# Altium PCB PCB1.PcbDoc (part 2 of 2)
Units mm, origin at the board's own origin, x right, y up, seen from the top; angles counter-clockwise.
Board outline 65.4 x 65.4 mm, 4 copper layers (Top Layer, Internal Plane 1, Signal Layer 1, Bottom Layer), stack 0.778 mm thick; 79 components, 51 nets, 285 pads, 952 vias.
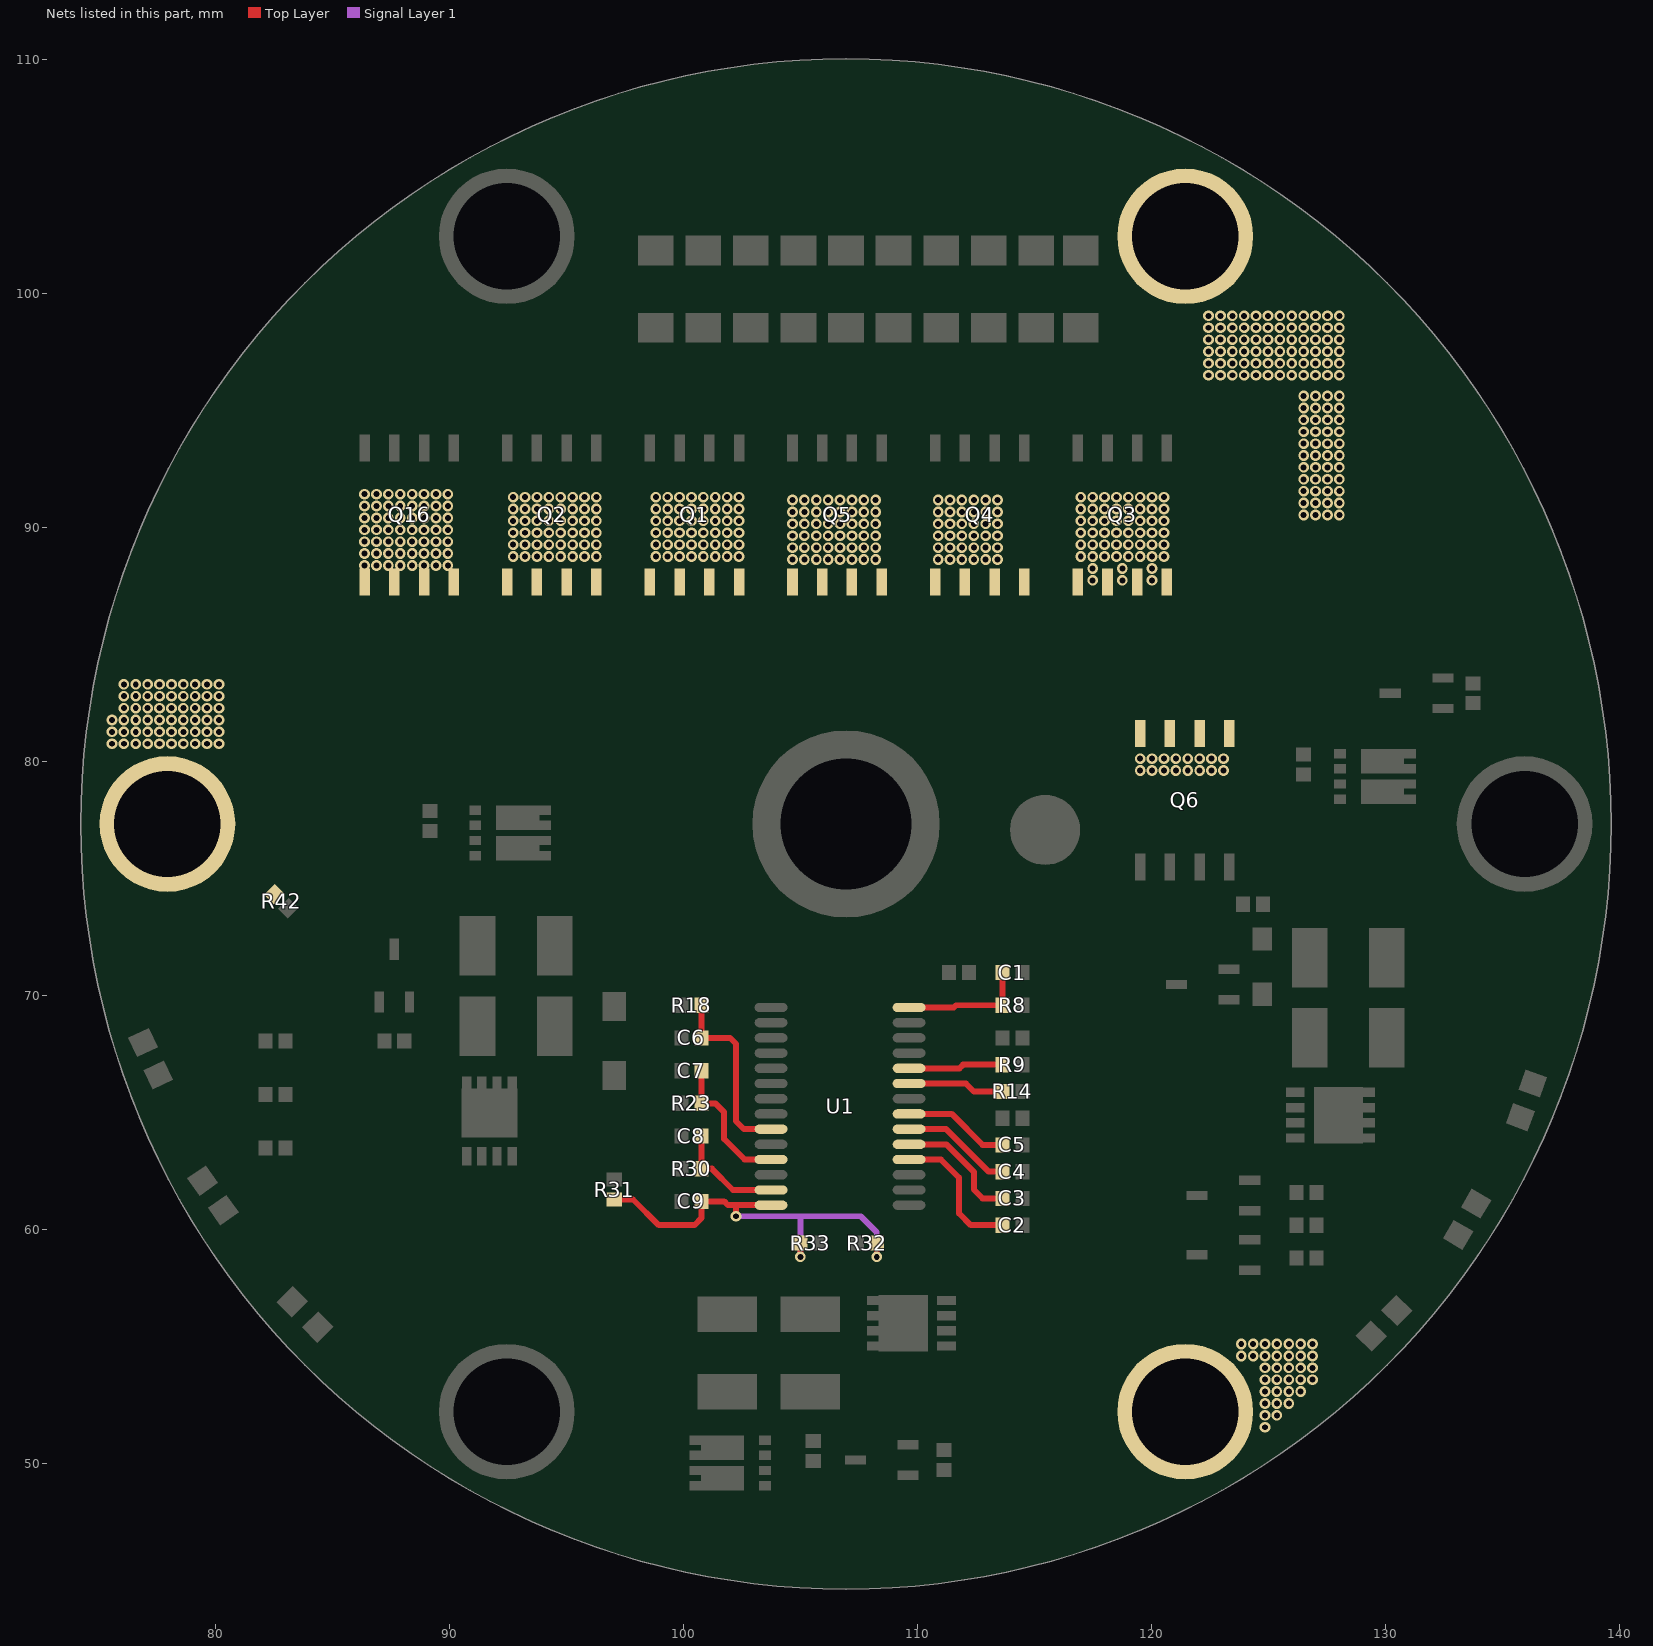
[diagram p4: the nets of this part, all layers, seen from the top]

## Via types
v1: diameter 0.457, hole 0.254, Top Layer to Bottom Layer, tented both sides, 952 vias

## Nets (pads, with @x,y where several pads share a name; then routed paths per layer and width w, separated by ;. In a path a pad name is that pad's centre, name@x,y a point inside that pad or via, vN(x,y) a via of type N, cw(c..) or ccw(c..) an arc to the next point about the centre after c; other vN are vias at no path point) (continued)
P-: pad.0@77.934,77.343 pad.0@121.434,52.228 pad.0@121.434,102.458 Q1.5 Q1.6 Q1.7 Q1.8 Q2.5 Q2.6 Q2.7 Q2.8 Q3.5 Q3.6 Q3.7 Q3.8 Q4.5 Q4.6 Q4.7 Q4.8 Q5.5 Q5.6 Q5.7 Q5.8 Q6.5 Q6.6 Q6.7 Q6.8 Q16.5 Q16.6 Q16.7 Q16.8 R42.2
  other v1: 124.841,51.562 124.841,52.07 125.349,52.07 124.841,52.578 125.349,52.578 125.857,52.578 124.841,53.086 125.349,53.086 125.857,53.086 126.365,53.086 124.841,53.594 125.349,53.594 125.857,53.594 126.365,53.594 126.873,53.594 124.841,54.102 125.349,54.102 125.857,54.102 126.365,54.102 126.873,54.102 123.825,54.61 124.333,54.61 124.841,54.61 125.349,54.61 125.857,54.61 126.365,54.61 126.873,54.61 123.825,55.118 124.333,55.118 124.841,55.118 125.349,55.118 125.857,55.118 126.365,55.118 126.873,55.118 119.507,79.629 120.015,79.629 120.523,79.629 121.031,79.629 121.539,79.629 122.047,79.629 122.555,79.629 123.063,79.629 119.507,80.137 120.015,80.137 120.523,80.137 121.031,80.137 121.539,80.137 122.047,80.137 122.555,80.137 123.063,80.137 75.565,80.772 76.073,80.772 76.581,80.772 77.089,80.772 77.597,80.772 78.105,80.772 78.613,80.772 79.121,80.772 79.629,80.772 80.137,80.772 75.565,81.28 76.073,81.28 76.581,81.28 77.089,81.28 77.597,81.28 78.105,81.28 78.613,81.28 79.121,81.28 79.629,81.28 80.137,81.28 75.565,81.788 76.073,81.788 76.581,81.788 77.089,81.788 77.597,81.788 78.105,81.788 78.613,81.788 79.121,81.788 79.629,81.788 80.137,81.788 76.073,82.296 76.581,82.296 77.089,82.296 77.597,82.296 78.105,82.296 78.613,82.296 79.121,82.296 79.629,82.296 80.137,82.296 76.073,82.804 76.581,82.804 77.089,82.804 77.597,82.804 78.105,82.804 78.613,82.804 79.121,82.804 79.629,82.804 80.137,82.804 76.073,83.312 76.581,83.312 77.089,83.312 77.597,83.312 78.105,83.312 78.613,83.312 79.121,83.312 79.629,83.312 80.137,83.312 117.475,87.757 118.745,87.757 120.015,87.757 117.475,88.265 118.745,88.265 120.015,88.265 86.36,88.392 86.868,88.392 87.376,88.392 87.884,88.392 88.392,88.392 88.9,88.392 89.408,88.392 89.916,88.392 104.648,88.646 105.156,88.646 105.664,88.646 106.172,88.646 106.68,88.646 107.188,88.646 107.696,88.646 108.204,88.646 110.871,88.646 111.379,88.646 111.887,88.646 112.395,88.646 112.903,88.646 113.411,88.646 92.71,88.773 93.218,88.773 93.726,88.773 94.234,88.773 94.742,88.773 95.25,88.773 95.758,88.773 96.266,88.773 98.806,88.773 99.314,88.773 99.822,88.773 100.33,88.773 100.838,88.773 101.346,88.773 101.854,88.773 102.362,88.773 116.967,88.773 117.475,88.773 117.983,88.773 118.491,88.773 118.999,88.773 119.507,88.773 120.015,88.773 120.523,88.773 86.36,88.9 86.868,88.9 87.376,88.9 87.884,88.9 88.392,88.9 88.9,88.9 89.408,88.9 89.916,88.9 104.648,89.154 105.156,89.154 105.664,89.154 106.172,89.154 106.68,89.154 107.188,89.154 107.696,89.154 108.204,89.154 110.871,89.154 111.379,89.154 111.887,89.154 112.395,89.154 112.903,89.154 113.411,89.154 92.71,89.281 93.218,89.281 93.726,89.281 94.234,89.281 94.742,89.281 95.25,89.281 95.758,89.281 96.266,89.281 98.806,89.281 99.314,89.281 99.822,89.281 100.33,89.281 100.838,89.281 101.346,89.281 101.854,89.281 102.362,89.281 116.967,89.281 117.475,89.281 117.983,89.281 118.491,89.281 118.999,89.281 119.507,89.281 120.015,89.281 120.523,89.281 86.36,89.408 86.868,89.408 87.376,89.408 87.884,89.408 88.392,89.408 88.9,89.408 89.408,89.408 89.916,89.408 104.648,89.662 105.156,89.662 105.664,89.662 106.172,89.662 106.68,89.662 107.188,89.662 107.696,89.662 108.204,89.662 110.871,89.662 111.379,89.662 111.887,89.662 112.395,89.662 112.903,89.662 113.411,89.662 92.71,89.789 93.218,89.789 93.726,89.789 94.234,89.789 94.742,89.789 95.25,89.789 95.758,89.789 96.266,89.789 98.806,89.789 99.314,89.789 99.822,89.789 100.33,89.789 100.838,89.789 101.346,89.789 101.854,89.789 102.362,89.789 116.967,89.789 117.475,89.789 117.983,89.789 118.491,89.789 118.999,89.789 119.507,89.789 120.015,89.789 120.523,89.789 86.36,89.916 86.868,89.916 87.376,89.916 87.884,89.916 88.392,89.916 88.9,89.916 89.408,89.916 89.916,89.916 104.648,90.17 105.156,90.17 105.664,90.17 106.172,90.17 106.68,90.17 107.188,90.17 107.696,90.17 108.204,90.17 110.871,90.17 111.379,90.17 111.887,90.17 112.395,90.17 112.903,90.17 113.411,90.17 92.71,90.297 93.218,90.297 93.726,90.297 94.234,90.297 94.742,90.297 95.25,90.297 95.758,90.297 96.266,90.297 98.806,90.297 99.314,90.297 99.822,90.297 100.33,90.297 100.838,90.297 101.346,90.297 101.854,90.297 102.362,90.297 116.967,90.297 117.475,90.297 117.983,90.297 118.491,90.297 118.999,90.297 119.507,90.297 120.015,90.297 120.523,90.297 86.36,90.424 86.868,90.424 87.376,90.424 87.884,90.424 88.392,90.424 88.9,90.424 89.408,90.424 89.916,90.424 126.492,90.551 127,90.551 127.508,90.551 128.016,90.551 104.648,90.678 105.156,90.678 105.664,90.678 106.172,90.678 106.68,90.678 107.188,90.678 107.696,90.678 108.204,90.678 110.871,90.678 111.379,90.678 111.887,90.678 112.395,90.678 112.903,90.678 113.411,90.678 92.71,90.805 93.218,90.805 93.726,90.805 94.234,90.805 94.742,90.805 95.25,90.805 95.758,90.805 96.266,90.805 98.806,90.805 99.314,90.805 99.822,90.805 100.33,90.805 100.838,90.805 101.346,90.805 101.854,90.805 102.362,90.805 116.967,90.805 117.475,90.805 117.983,90.805 118.491,90.805 118.999,90.805 119.507,90.805 120.015,90.805 120.523,90.805 86.36,90.932 86.868,90.932 87.376,90.932 87.884,90.932 88.392,90.932 88.9,90.932 89.408,90.932 89.916,90.932 126.492,91.059 127,91.059 127.508,91.059 128.016,91.059 104.648,91.186 105.156,91.186 105.664,91.186 106.172,91.186 106.68,91.186 107.188,91.186 107.696,91.186 108.204,91.186 110.871,91.186 111.379,91.186 111.887,91.186 112.395,91.186 112.903,91.186 113.411,91.186 92.71,91.313 93.218,91.313 93.726,91.313 94.234,91.313 94.742,91.313 95.25,91.313 95.758,91.313 96.266,91.313 98.806,91.313 99.314,91.313 99.822,91.313 100.33,91.313 100.838,91.313 101.346,91.313 101.854,91.313 102.362,91.313 116.967,91.313 117.475,91.313 117.983,91.313 118.491,91.313 118.999,91.313 119.507,91.313 120.015,91.313 120.523,91.313 86.36,91.44 86.868,91.44 87.376,91.44 87.884,91.44 88.392,91.44 88.9,91.44 89.408,91.44 89.916,91.44 126.492,91.567 127,91.567 127.508,91.567 128.016,91.567 126.492,92.075 127,92.075 127.508,92.075 128.016,92.075 126.492,92.583 127,92.583 127.508,92.583 128.016,92.583 126.492,93.091 127,93.091 127.508,93.091 128.016,93.091 126.492,93.599 127,93.599 127.508,93.599 128.016,93.599 126.492,94.107 127,94.107 127.508,94.107 128.016,94.107 126.492,94.615 127,94.615 127.508,94.615 128.016,94.615 126.492,95.123 127,95.123 127.508,95.123 128.016,95.123 126.492,95.631 127,95.631 127.508,95.631 128.016,95.631 122.428,96.52 122.936,96.52 123.444,96.52 123.952,96.52 124.46,96.52 124.968,96.52 125.476,96.52 125.984,96.52 126.492,96.52 127,96.52 127.508,96.52 128.016,96.52 122.428,97.028 122.936,97.028 123.444,97.028 123.952,97.028 124.46,97.028 124.968,97.028 125.476,97.028 125.984,97.028 126.492,97.028 127,97.028 127.508,97.028 128.016,97.028 122.428,97.536 122.936,97.536 123.444,97.536 123.952,97.536 124.46,97.536 124.968,97.536 125.476,97.536 125.984,97.536 126.492,97.536 127,97.536 127.508,97.536 128.016,97.536 122.428,98.044 122.936,98.044 123.444,98.044 123.952,98.044 124.46,98.044 124.968,98.044 125.476,98.044 125.984,98.044 126.492,98.044 127,98.044 127.508,98.044 128.016,98.044 122.428,98.552 122.936,98.552 123.444,98.552 123.952,98.552 124.46,98.552 124.968,98.552 125.476,98.552 125.984,98.552 126.492,98.552 127,98.552 127.508,98.552 128.016,98.552 122.428,99.06 122.936,99.06 123.444,99.06 123.952,99.06 124.46,99.06 124.968,99.06 125.476,99.06 125.984,99.06 126.492,99.06 127,99.06 127.508,99.06 128.016,99.06
TOC1: C4.1 U1.6 | length 4.7
  Top Layer w0.254: U1.6@109.63,64.303 111.211,64.303 113.03,62.484 C4.1@113.621,62.484
TOC2: C5.1 U1.7 | length 4.5
  Top Layer w0.254: U1.7@109.63,64.953 111.45,64.953 112.776,63.627 C5.1@113.621,63.627
TOV: C2.1 U1.4 | length 6
  Top Layer w0.254: U1.4@109.63,63.003 110.987,63.003 111.76,62.23 111.76,60.706 112.268,60.198 C2.1@113.621,60.198
TOVD: C3.1 U1.5 | length 5.4
  Top Layer w0.254: U1.5@109.63,63.653 111.222,63.653 112.395,62.48 112.395,61.722 112.776,61.341 C3.1@113.621,61.341
TRH: R14.1 U1.9 | length 4.1
  Top Layer w0.254: U1.9@109.63,66.253 112.055,66.253 112.395,65.913 R14.1@113.621,65.913
V+: C9.2 R31.1 R32.2 R33.2 U1.28 | length 18.8
  Top Layer w0.254: R31.1@97.028,61.297 97.834,61.297 98.933,60.198 100.457,60.198 100.755,60.496 C9.2@100.755,61.214 101.727,61.214 101.888,61.053 102.235,61.053 ; v1(102.235,60.579) 102.235,61.053 ; U1.28@103.73,61.053 102.235,61.053 ; v1(104.985,58.845) R33.2@104.985,59.436 ; v1(108.248,58.845) R32.2@108.248,59.436
  Signal Layer 1 w0.254: v1(102.235,60.579) 104.902,60.579 ; v1(104.985,58.845) 104.985,60.496 104.902,60.579 ; v1(108.248,58.845) 108.248,59.9 107.569,60.579 104.902,60.579
VC1: C6.2 R18.1 U1.23 | length 7.9
  Top Layer w0.254: R18.1@100.755,69.596 C6.2@100.755,68.199 101.981,68.199 102.235,67.945 102.235,64.643 102.575,64.303 U1.23@103.73,64.303
VC2: C7.2 R23.1 U1.25 | length 6
  Top Layer w0.254: C7.2@100.755,66.802 R23.1@100.755,65.405 101.346,65.405 101.727,65.024 101.727,63.881 102.605,63.003 U1.25@103.73,63.003
VC3: C8.2 R30.1 U1.27 | length 4.7
  Top Layer w0.254: C8.2@100.755,64.008 R30.1@100.755,62.611 101.2,62.611 102.108,61.703 U1.27@103.73,61.703
VIN: C1.1 R8.1 U1.14 | length 5.4
  Top Layer w0.254: U1.14@109.63,69.503 111.54,69.503 111.633,69.596 R8.1@113.621,69.596 C1.1@113.621,70.993
VM: R9.1 U1.10 | length 4.1
  Top Layer w0.254: U1.10@109.63,66.903 111.786,66.903 111.939,67.056 R9.1@113.621,67.056
pads on no net: U1.1 U1.13 U1.15 U1.18 U1.20

## Polygon pours and split planes (outlines as drawn)
BAT- on Top Layer "Component Side-No Net 1" (solid, remove dead copper, pour order 86): 76.454,88.392 75.438,89.408 75.438,109.093 83.566,109.093 89.281,114.808 89.408,114.681 116.332,114.681 116.332,109.093 120.777,104.648 119.507,103.378 119.507,90.297
ISEN_N on Top Layer "Component Side-No Net 1" (solid, remove dead copper, pour order 82): 92.983,92.583 86.106,92.583 86.106,97.663 86.487,98.044 86.741,98.298 93.091,98.298
P- on Top Layer "Component Side-No Net 1" (solid, remove dead copper, pour order 80): 119.507,55.753 119.634,55.88 127.127,55.88 127.127,47.879 127,47.752 124.714,45.466 117.856,45.466 117.856,53.975 118.618,54.737
7V4 on Top Layer "Component Side-No Net 1" (solid, remove dead copper, pour order 79): 90.17,63.627 92.329,63.627 92.329,60.198 92.583,59.944 92.71,59.817 94.615,59.817 99.06,59.817 99.695,59.182 99.822,59.055 99.822,53.467 97.409,53.467 96.52,54.356 95.123,55.753 90.043,55.753 90.043,63.5 90.17,63.627
CELL3 on Top Layer "Component Side-No Net 1" (solid, remove dead copper, pour order 78): 90.297,67.056 92.202,67.056 92.964,67.818 92.964,73.533 93.218,73.787 94.234,73.787 94.361,73.787 94.742,74.168 94.742,77.47 92.277,77.47 91.896,77.089 91.659,76.852 91.659,76.399 90.796,76.399 90.201,75.804
12VBAL on Top Layer "Component Side-No Net 1" (solid, remove dead copper, pour order 77): 90.043,63.881 94.488,63.881 95.504,64.897 95.885,65.278 95.885,68.961 95.885,73.533 95.631,73.787 93.218,73.787 93.091,73.66 92.964,73.533 92.964,71.247 92.964,67.818 92.456,67.31 92.202,67.056 90.678,67.056 90.297,67.056 90.043,66.802
12V on Top Layer "Component Side-No Net 1" (solid, remove dead copper, pour order 76): 91.821,77.089 96.774,77.089 98.552,77.089 101.473,74.168 102.87,72.771 107.569,72.771 111.125,72.771 112.268,73.914 112.395,74.041 113.157,74.041 113.157,83.058 112.776,83.439 91.821,83.439
NetQ13_1 on Top Layer "Component Side-No Net 1" (solid, remove dead copper, pour order 75): 88.265,78.613 91.313,78.613 91.44,78.486 91.694,78.232 91.694,76.708 91.694,76.327 91.567,76.2 91.059,75.692 90.551,75.692 88.265,75.692
3V7 on Top Layer "Component Side-No Net 1" (solid, remove dead copper, pour order 72): 110.744,56.515 114.681,56.515 114.681,54.864 110.744,54.864
7V4BAL on Top Layer "Component Side-No Net 1" (solid, remove dead copper, pour order 71): 99.822,57.404 100.076,57.404 110.617,57.404 110.617,54.737 110.49,54.61 99.822,54.61
7V4 on Top Layer "Component Side-No Net 1" (solid, remove dead copper, pour order 69): 100.33,50.165 100.347,50.148 102.783,50.148 102.783,51.475 103.124,51.816 103.251,51.943 106.68,51.943 106.934,52.197 106.934,53.594 106.934,54.102 106.68,54.356 99.695,54.356 96.901,54.356 96.393,53.848 96.139,53.594 96.139,50.292 96.393,50.292 97.536,49.149
NetQ7_1 on Top Layer "Component Side-No Net 1" (solid, remove dead copper, pour order 68): 103.124,50.673 103.251,50.546 106.045,50.546 106.045,48.387 105.918,48.26 105.791,48.133 102.616,48.133 102.616,50.673
CELL2 on Top Layer "Component Side-No Net 1" (solid, remove dead copper, pour order 67): 99.822,49.911 102.616,49.911 102.616,44.196 92.202,44.196 91.694,44.704 88.519,44.704 88.519,52.832 88.519,54.102 88.519,55.118 89.154,55.753 93.345,55.753 95.123,55.753 96.012,54.864 96.52,54.356 96.52,51.689 96.52,51.562 97.79,50.292 98.171,49.911 99.568,49.911
BAT- on Top Layer "Component Side-No Net 1" (solid, remove dead copper, pour order 66): 126.619,64.389 123.19,64.389 123.19,66.167 126.619,66.167
3V7BAL on Top Layer "Component Side-No Net 1" (solid, remove dead copper, pour order 65): 125.73,73.025 128.651,73.025 129.032,72.644 129.921,71.755 129.921,66.802 129.921,64.008 129.54,63.627 129.413,63.5 126.873,63.5 126.746,63.5 126.746,66.167 125.73,66.167 125.603,66.294
3V7 on Top Layer "Component Side-No Net 1" (solid, remove dead copper, pour order 64): 128.905,79.248 128.905,67.056 129.159,66.802 130.81,66.802 131.445,66.802 132.588,67.945 133.096,68.453 133.096,75.057 133.096,79.629 128.905,79.629
CELL1 on Top Layer "Component Side-No Net 1" (solid, remove dead copper, pour order 63): 128.778,80.899 128.778,79.629 128.905,79.502 130.81,79.502 131.572,79.502 131.953,79.121 132.207,78.867 132.207,77.089 132.207,75.184 132.842,74.549 133.096,74.295 140.462,74.295 140.462,80.772 141.224,81.534 141.097,81.407 129.286,81.407
NetQ8_1 on Top Layer "Component Side-No Net 1" (solid, remove dead copper, pour order 62): 124.587,81.026 128.524,81.026 128.524,77.724 124.587,77.724
CHG- on Top Layer "Component Side-No Net 1" (solid, remove dead copper, pour order 61): 113.157,81.534 118.11,81.534 118.11,76.581 118.237,76.454 122.047,76.454 122.682,76.454 122.809,76.327 122.809,74.422 122.809,72.263 122.555,72.009 112.649,72.009 112.649,81.28 112.903,81.534
P- on Top Layer "Component Side-No Net 1" (solid, remove dead copper, pour order 60): 118.364,81.788 118.364,76.835 123.571,76.835 124.46,76.835 124.46,82.804 118.491,82.804 118.364,82.931
P- on Top Layer "Component Side-No Net 1" (solid, remove dead copper, pour order 50): 91.567,92.329 75.184,92.329 72.898,92.329 72.263,91.694 71.882,91.313 71.882,74.93 71.882,73.279 71.628,73.025 71.882,72.771 80.264,72.771 81.407,72.771 82.423,73.787 83.82,75.184 83.82,79.502 83.82,79.629 85.725,81.534 86.106,81.915 92.583,81.915 92.583,92.075 92.329,92.329
P- on Top Layer "Component Side-No Net 1" (solid, remove dead copper, pour order 49): 118.237,107.442 118.237,99.568 120.142,99.568 120.65,99.06 121.412,98.298 121.412,92.456 121.285,92.329 111.379,92.329 91.567,92.329 91.567,84.582 91.567,82.169 91.44,82.042 91.567,81.915 112.141,81.915 127.508,81.915 132.715,87.122 133.477,87.884 133.477,111.125 119.253,111.125 118.237,110.109
ISEN_N on Top Layer "Component Side-No Net 1" (solid, remove dead copper, pour order 48): 92.837,92.583 121.285,92.583 121.285,98.298 120.904,98.679 120.396,99.187 116.459,99.187 97.663,99.187 96.774,98.298 92.837,98.298
BAT- on Top Layer "Component Side-No Net 1" (solid, remove dead copper, pour order 47): 89.535,104.902 89.535,100.457 89.535,100.33 90.424,99.441 93.853,99.441 96.52,99.441 97.536,100.457 97.663,100.584 101.092,100.584 117.856,100.584 118.11,100.838 118.237,100.965 118.237,107.569 118.237,110.871 118.11,110.998 117.729,111.379 89.535,111.379
BAT- on Top Layer "Component Side-No Net 1" (solid, remove dead copper, pour order 70): 71.628,41.402 72.009,41.783 138.938,41.783 138.938,50.927 146.558,58.547 146.177,58.928 146.177,112.141 79.502,112.141 66.548,125.095
BAT- on Bottom Layer "Component Side-No Net 1" (solid, remove dead copper, pour order 87): 66.929,111.76 136.906,111.76 138.557,110.109 146.685,101.981 146.685,46.99 146.685,38.989 138.43,30.734 134.493,34.671 64.897,34.671
P- on Bottom Layer "Component Side-No Net 1" (solid, remove dead copper, pour order 85): 84.201,77.724 84.201,78.486 87.63,81.915 118.237,81.915 118.491,81.915 118.872,81.534 118.872,78.994 119.253,78.613 123.063,78.613 123.444,78.994 124.206,79.756 124.206,81.915 124.206,82.042 127.762,85.598 129.921,87.757 129.921,97.282 129.921,97.663 130.302,98.044 133.858,98.044 133.858,105.41 134.493,106.045 129.921,110.617 128.778,110.617 90.551,110.617 90.043,110.109 90.297,109.855 90.297,96.012 90.297,93.472 89.154,92.329 89.027,92.456 83.947,92.456 77.343,92.456 76.962,92.075
ISEN_N on Bottom Layer "Component Side-No Net 1" (solid, remove dead copper, pour order 84): 92.837,92.785 87.936,92.785 87.884,92.837 87.884,97.282 87.884,98.425 88.519,99.06 88.646,99.187 88.773,99.187 93.726,99.187 93.599,99.06 93.599,92.71
P- on Bottom Layer "Component Side-No Net 1" (solid, remove dead copper, pour order 56): 81.661,75.184 84.201,77.724 84.201,83.947 84.201,84.328 85.471,85.598 89.154,85.598 127.762,85.598 129.286,87.122 129.794,87.63 129.794,103.759 124.333,103.759 119.253,108.839 117.729,107.315 117.729,92.71 117.729,91.313 115.951,89.535 115.316,90.17 78.613,90.17 78.613,76.327 77.343,75.057
P- on Bottom Layer "Component Side-No Net 1" (solid, remove dead copper, pour order 74): 114.3,45.466 114.3,50.8 114.173,50.927 119.38,56.134 130.564,56.134 131.243,55.455 131.318,55.38 131.318,46.355
3V7 on Bottom Layer "Component Side-No Net 1" (solid, remove dead copper, pour order 73): 132.588,72.517 132.588,61.595 130.048,59.055 128.143,57.15 124.079,57.15 118.237,57.15 116.459,55.372 116.078,54.991 112.649,54.991 111.76,54.991 111.506,55.245 111.506,56.388 111.506,56.642 111.633,56.769 111.76,56.896 112.268,56.896 114.808,56.896 115.697,57.785 117.729,59.817 120.015,59.817 126.746,59.817 128.905,61.976 130.556,63.627 130.556,72.39 130.81,72.644 132.461,72.644
ISEN_N on Bottom Layer "Component Side-No Net 1" (solid, remove dead copper, pour order 58): 92.837,92.329 92.837,99.568 93.218,99.949 94.615,101.346 118.872,101.346 118.872,92.583 118.745,92.456 117.856,91.567 115.062,91.567
P- on Bottom Layer "Component Side-No Net 1" (solid, remove dead copper, pour order 55): 73.406,74.168 73.787,73.787 79.248,73.787 80.264,73.787 81.28,74.803 81.661,75.184 81.661,83.566 81.661,85.09 83.693,87.122 83.947,87.376 101.6,87.376 125.476,87.376 129.032,90.932 129.413,91.313 129.413,104.267 129.413,106.299 126.619,109.093 123.952,111.76 116.078,111.76 116.078,93.853 115.189,92.964 114.808,92.583 107.442,92.583 74.295,92.583 73.406,91.694
BAT- on Bottom Layer "Component Side-No Net 1" (solid, remove dead copper, pour order 51): 89.535,100.33 89.535,106.426 89.535,106.68 91.186,108.331 93.345,110.49 115.951,110.49 115.951,100.838 115.697,100.584 97.79,100.584 97.663,100.584 96.52,99.441 90.424,99.441
ISEN_N on Signal Layer 1 "Component Side-No Net 1" (solid, remove dead copper, pour order 92): 107.569,99.06 107.569,99.695 107.696,99.822 109.093,99.822 115.824,99.822 116.586,99.06 116.713,98.933 116.713,97.663 116.713,95.631 117.094,95.25 117.221,95.123 117.221,94.742 116.84,94.361 116.713,94.234 115.062,94.234 107.188,94.234
BAT- on Signal Layer 1 "Component Side-No Net 1" (solid, remove dead copper, pour order 91): 75.819,40.64 79.121,43.942 137.668,43.942 137.668,106.934 142.621,111.887 139.7,114.808 74.168,114.808 72.771,114.808 72.517,114.554
3V7 on Signal Layer 1 "Component Side-No Net 1" (solid, remove dead copper, pour order 90): 130.429,73.279 132.588,73.279 132.969,72.898 132.715,72.644 132.715,67.564 130.556,67.564 130.429,67.691
BAT- on Signal Layer 1 "Component Side-No Net 1" (solid, remove dead copper, pour order 89): 122.301,66.802 122.428,66.675 126.746,66.675 126.746,64.516 126.365,64.135 122.047,64.135
P- on Signal Layer 1 "Component Side-No Net 1" (solid, remove dead copper, pour order 88): 116.332,45.72 116.332,64.516 120.65,68.834 125.095,73.279 125.095,88.646 125.603,102.108 127,103.505 127.381,103.124 139.954,103.124 139.954,43.18 140.843,42.291
ISEN_N on Signal Layer 1 "Component Side-No Net 1" (solid, remove dead copper, pour order 83): 93.98,94.565 87.934,94.565 87.884,94.615 87.884,97.536 87.884,98.425 88.646,99.187 94.107,99.187 97.282,99.187 97.536,98.933 96.774,98.171 96.774,95.758
ISEN_N on Signal Layer 1 "Component Side-No Net 1" (solid, remove dead copper, pour order 81): 93.853,93.98 86.233,93.98 86.233,92.202 86.106,92.075 94.869,92.075 94.869,93.98 94.996,94.107
ISEN_N on Signal Layer 1 "Component Side-No Net 1" (solid, remove dead copper, pour order 59): 93.98,94.234 93.98,97.028 95.504,98.552 96.139,99.187 99.314,99.187 115.189,99.187 115.443,98.933 115.443,94.234
ISEN_N on Signal Layer 1 "Component Side-No Net 1" (solid, remove dead copper, pour order 57): 93.472,93.98 93.599,94.107 114.681,94.107 114.681,92.837 114.808,92.71 93.345,92.71
P- on Signal Layer 1 "Component Side-No Net 1" (solid, remove dead copper, pour order 54): 118.364,107.442 118.364,98.425 118.364,93.091 117.475,93.091 116.332,93.091 116.332,89.408 116.332,87.884 116.967,87.249 117.221,86.995 120.396,86.995 128.143,86.995 129.159,88.011 129.921,88.773 129.921,107.696 126.746,107.696 124.968,109.474
P- on Signal Layer 1 "Component Side-No Net 1" (solid, remove dead copper, pour order 53): 113.919,92.456 113.919,87.63 113.03,86.741 111.887,85.598 93.599,85.598 83.693,85.598 81.915,83.82 81.661,83.566 81.661,79.629 81.661,75.565 80.264,74.168 73.025,74.168 73.025,92.456
BAT- on Signal Layer 1 "Component Side-No Net 1" (solid, remove dead copper, pour order 52): 89.535,104.521 89.535,100.457 90.551,99.441 96.647,99.441 96.647,99.568 97.663,100.584 99.568,102.489 115.824,102.489 116.205,102.87 116.205,105.029 116.205,109.728 115.443,110.49 114.3,112.395 89.535,112.014
ISEN_N on Internal Plane 1 (split plane): 115.822,98.371 115.822,94.288 114.427,92.893 114.138,93.183 114.096,93.211 114.046,93.22 93.474,93.22 93.474,96.593 94.669,97.788 96.52,97.788 96.57,97.797 96.612,97.825 98.225,99.439 114.754,99.439
P- on Internal Plane 1 (split plane): 119.979,106.773 120.698,106.444 121.408,106.098 122.109,105.734 122.801,105.353 123.484,104.955 124.157,104.54 124.819,104.11 125.47,103.663 126.111,103.2 126.739,102.721 127.356,102.228 127.961,101.719 128.553,101.196 129.132,100.658 129.697,100.106 130.249,99.541 130.787,98.962 131.31,98.37 131.819,97.765 132.312,97.148 132.791,96.52 133.254,95.879 133.701,95.228 134.131,94.566 134.546,93.893 134.944,93.21 135.325,92.518 135.689,91.817 136.035,91.107 136.364,90.388 136.675,89.662 136.969,88.929 137.244,88.188 137.501,87.441 137.74,86.688 137.96,85.929 138.161,85.165 138.344,84.396 138.507,83.623 138.652,82.847 138.777,82.067 138.884,81.284 138.971,80.498 139.039,79.711 139.087,78.923 139.116,78.133 139.126,77.364 139.124,77.343 139.126,77.322 139.116,76.553 139.087,75.763 139.039,74.975 138.971,74.188 138.884,73.402 138.777,72.619 138.652,71.839 138.507,71.063 138.344,70.29 138.161,69.521 137.96,68.757 137.74,67.998 137.501,67.245 137.244,66.498 136.969,65.757 136.675,65.024 136.364,64.298 136.035,63.579 135.689,62.869 135.325,62.168 134.944,61.476 134.546,60.793 134.131,60.12 133.701,59.458 133.254,58.807 132.791,58.166 132.312,57.538 131.819,56.921 131.31,56.316 130.787,55.724 130.249,55.145 129.697,54.58 129.132,54.028 128.553,53.49 127.961,52.967 127.356,52.458 126.739,51.965 126.111,51.486 125.47,51.023 124.819,50.576 124.157,50.146 123.484,49.731 122.801,49.333 122.109,48.952 121.408,48.588 120.698,48.242 119.979,47.913 119.253,47.602 118.52,47.308 117.779,47.033 117.752,47.023 116.842,47.933 116.842,57.858 121.72,62.736 123.952,62.736 124.002,62.745 124.044,62.773 125.568,64.297 125.596,64.339 125.605,64.389 125.605,69.596 125.596,69.646 125.568,69.688 124.933,70.323 124.891,70.351 124.841,70.36 120.831,70.36 118.747,72.444 118.747,80.718 119.688,81.659 122.555,81.659 122.605,81.668 122.647,81.696 123.79,82.839 123.818,82.881 123.827,82.931 123.827,93.726 123.818,93.776 123.79,93.818 121.414,96.193 121.414,98.171 121.405,98.221 121.377,98.263 117.858,101.781 117.858,104.975 119.753,106.87
P- on Internal Plane 1 (split plane): 80.807,92.999 80.849,92.971 80.899,92.962 113.992,92.962 114.298,92.656 114.298,92.456 114.298,88.065 110.69,84.457 86.233,84.457 86.183,84.448 86.141,84.42 82.204,80.483 82.176,80.441 82.167,80.391 82.167,74.984 81.226,74.043 74.913,74.043 74.897,74.188 74.829,74.975 74.781,75.763 74.752,76.553 74.742,77.322 74.744,77.343 74.742,77.364 74.752,78.133 74.781,78.923 74.829,79.711 74.897,80.498 74.984,81.284 75.091,82.067 75.216,82.847 75.361,83.623 75.524,84.396 75.707,85.165 75.908,85.929 76.128,86.688 76.367,87.441 76.624,88.188 76.899,88.929 77.193,89.662 77.504,90.388 77.833,91.107 78.179,91.817 78.543,92.518 78.924,93.21 79.322,93.893 79.548,94.259
BAT- on Internal Plane 1 (split plane): 215 vertices, not listed, extent 74.942,45.151 125.347,109.535

## Keep-outs
Keep-Out Layer:
  circle w0.254: c106.934,77.343 r32.7

## Other copper
Internal Plane 1 (plane layer: these items are gaps in the copper):
  lines w0.254: 74.422,73.914 81.28,73.914 82.296,74.93 82.296,80.391 86.233,84.328 110.744,84.328 114.427,88.011 114.427,92.456 114.427,92.71 ; 79.375,94.615 80.899,93.091 114.046,93.091 114.427,92.71 ; 93.345,93.218 93.345,96.647 94.615,97.917 96.52,97.917 98.171,99.568 114.808,99.568 115.951,98.425 115.951,94.234 114.427,92.71 ; 117.983,46.609 116.713,47.879 116.713,57.912 121.666,62.865 123.952,62.865 125.476,64.389 125.476,69.596 124.841,70.231 120.777,70.231 118.618,72.39 118.618,80.772 119.634,81.788 122.555,81.788 123.698,82.931 123.698,93.726 121.285,96.139 121.285,98.171 117.729,101.727 117.729,105.029 120.142,107.442 120.142,107.696

## Silkscreen, mask and mechanical layers (free items; w line width, h text height)
Top Overlay:
  lines w0.254: 75.137,69.709 84.469,69.709 86.106,68.072 86.106,52.197 ; 127.889,52.959 127.889,61.214 130.429,63.754 130.429,65.786 132.334,67.691 137.668,67.691
  lines w1.5: 106.807,84.582 106.807,83.439 107.569,82.677 109.728,82.677 111.887,80.518 111.887,77.978 112.903,76.962
  text "P-" at 124.714,101.346 h2.5
  text "B-" at 86.995,100.711 h2.5
  text "V1.1" at 129.794,88.9 h2.5 r90
  text "Reverse" at 81.915,86.995 h2.5 r90
  text "Protected" at 84.328,86.995 h2.5 r90
  text "2025/03/08" at 132.334,85.344 h2.5 r90
  text "CELL1" at 137.541,80.518 h2.5 r90
  text "3S_LiBatt-Protector" at 80.645,80.391 h2.5
  text "CHG-" at 113.411,79.121 h2
  text "B+" at 102.362,76.962 h2.5 r90
  text "P-" at 81.28,76.454 h2.5
  text "RUVP" at 84.328,73.533 h2
  text "电池" at 133.096,71.501 h3
  text "均衡指示" at 75.438,70.358 h2.5
  text "装反" at 132.842,68.707 h3
  text "B3" at 78.359,67.691 h2
  text "B3" at 132.715,65.151 h2
  text "Redstoner_35" at 119.888,64.135 h2 r90
  text "BM3451" at 107.315,62.611 h2 r90
  text "B2" at 81.661,61.087 h2
  text "B2" at 129.794,60.325 h2
  text "B1" at 83.693,58.166 h2
  text "B1" at 128.27,57.785 h2
  text "CELL2" at 89.408,55.626 h2.5
  text "Designed By:" at 119.761,55.372 h1.6 r90
  text "DFEx-FarBeaMon3tr" at 117.729,54.61 h3 r90
  text "P-" at 117.983,48.133 h2.5
Bottom Overlay:
  circle w0.254: c106.934,77.343 r10
  text "DFEx-GT96-3SLiPROT" at 115.951,90.932 h2
  text "PCB_REV:V1.0" at 113.157,88.9 h2
  text "12V+" at 108.204,82.042 h2
Top Solder:
  rectangle: 119.38,72.771 122.174,76.2
  rectangle: 87.376,95.123 94.615,97.663
  rectangle: 87.376,92.837 90.424,97.536
  region: 126.111,82.804 126.111,94.804 123.111,94.804 123.111,82.804
  rectangle: 76.392,82.979 88.392,85.979
  rectangle: 88.773,82.979 100.773,85.979
  rectangle: 110.809,83.058 122.809,86.058
  rectangle: 93.472,92.837 96.52,95.885
  rectangle: 99.568,92.837 102.616,95.885
  rectangle: 105.664,92.837 108.712,95.758
  rectangle: 111.76,92.71 114.808,95.758
  rectangle: 117.856,92.837 121.031,97.155
  rectangle: 93.345,94.663 113.345,97.663
  rectangle: 96.52,103.251 116.52,106.251
  lines w1.5: 115.443,77.216 115.57,77.089 115.57,74.295 116.332,73.533 120.777,73.533
  lines w2: 77.597,76.454 77.597,81.28 79.121,82.804 79.121,84.709 ; 93.98,102.87 95.758,104.648 97.79,104.648 ; 112.268,96.139 118.618,96.139 119.253,95.504 119.253,95.25 ; 121.539,102.235 124.46,99.314 124.46,93.218